# Altium PCB PCB1.PcbDoc
Units mil, origin at the board's own origin, x right, y up, seen from the top; angles counter-clockwise.
Board outline 3528 x 6485 mil, 2 copper layers (Top Layer, Bottom Layer); 79 components, 79 nets, 280 pads, 44 vias.
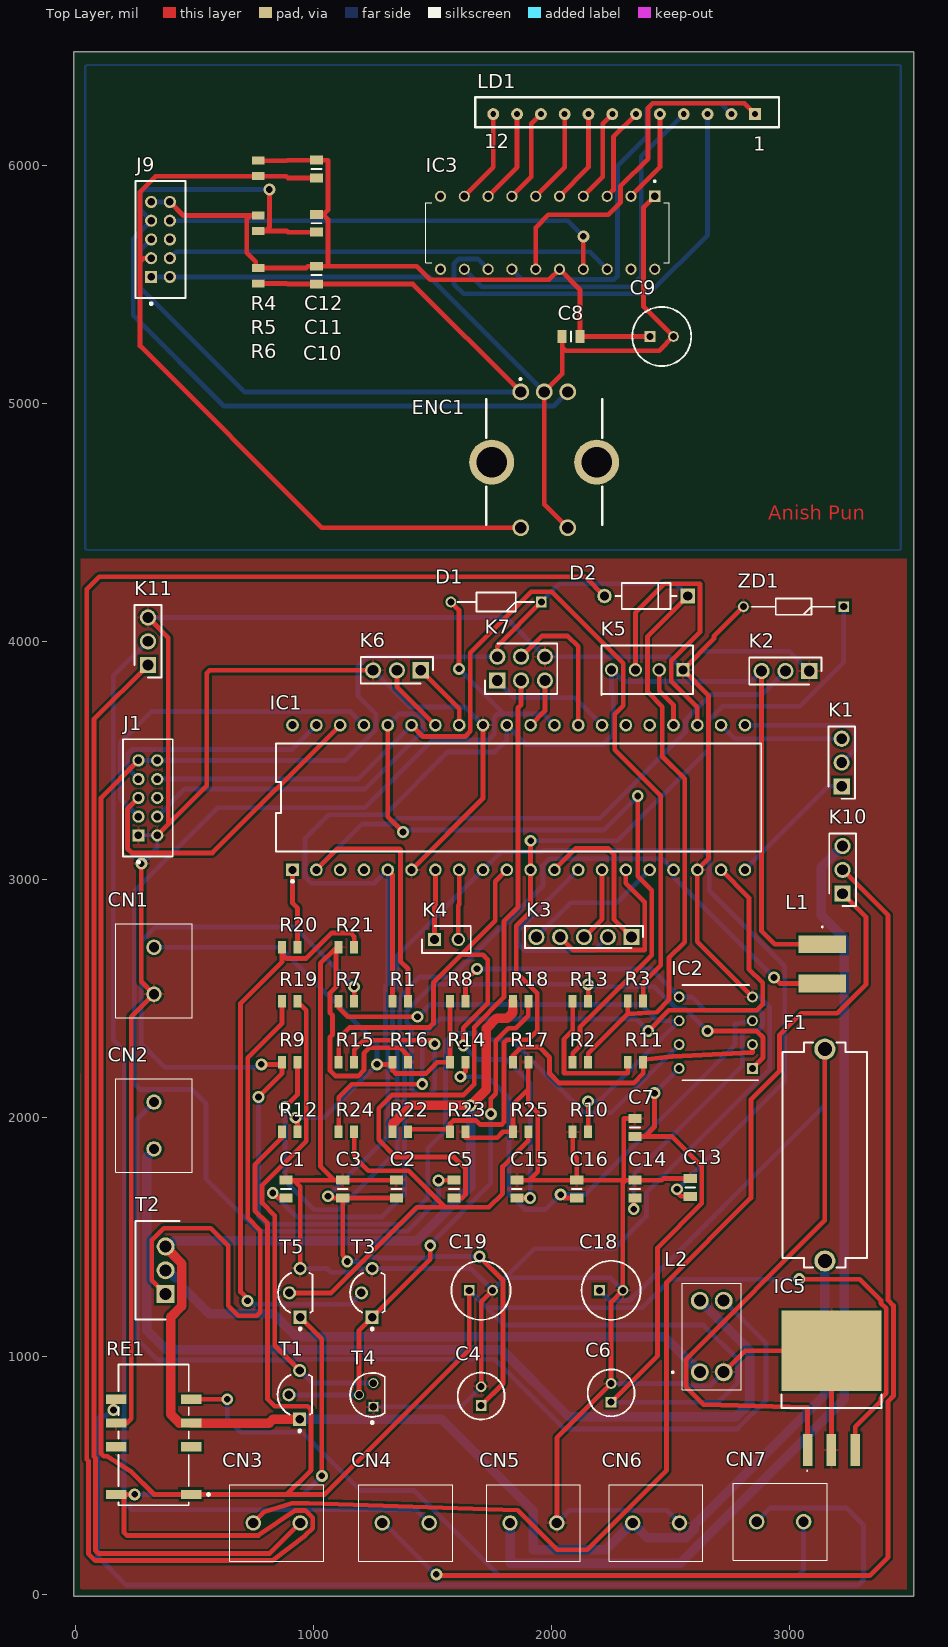
[diagram p0: Top Layer view]
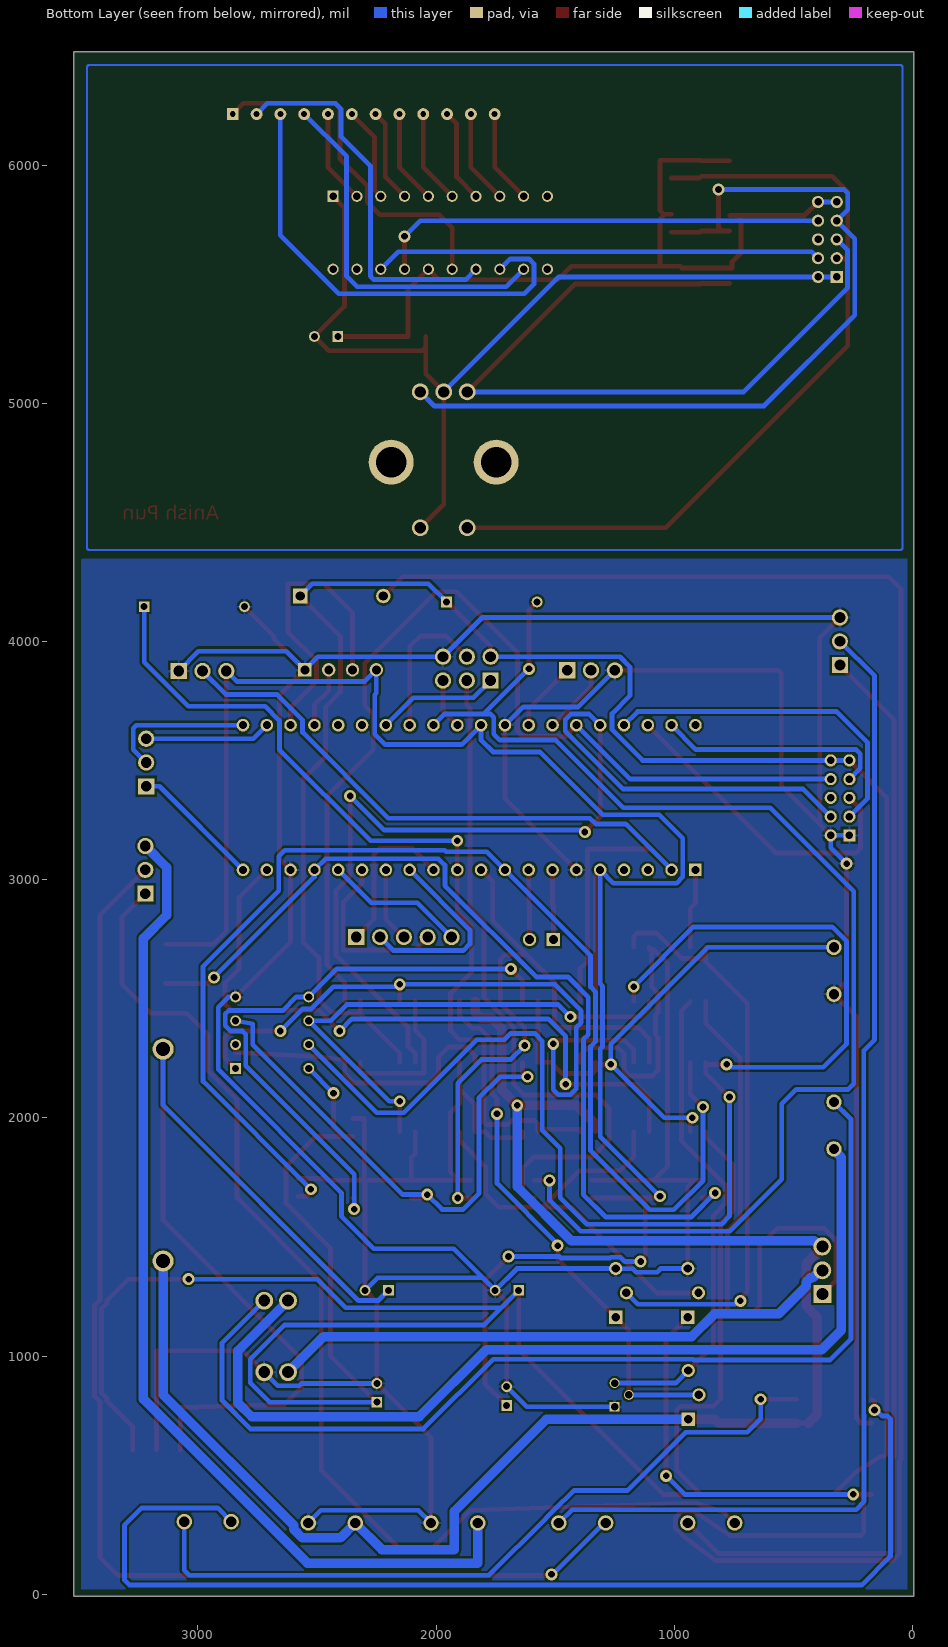
[diagram p1: Bottom Layer view, seen from below]
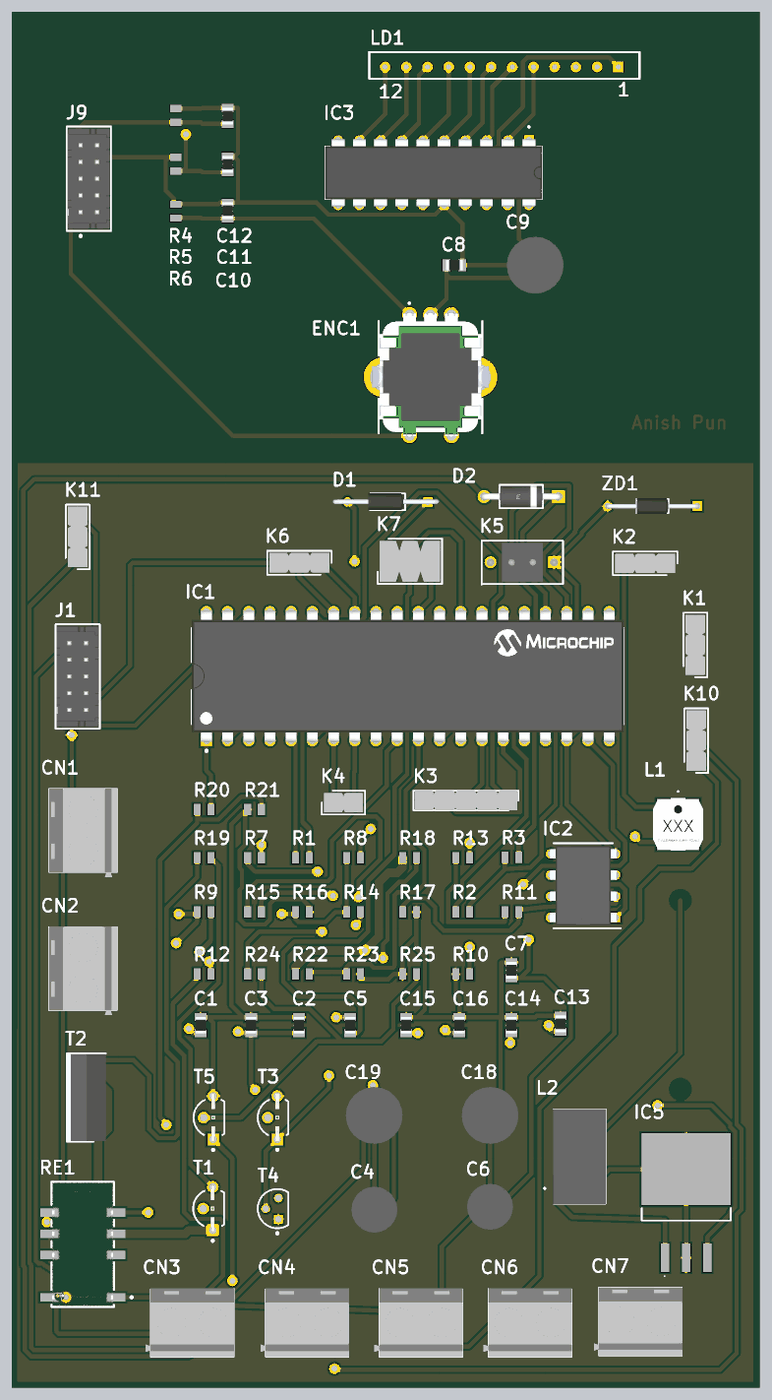
[diagram p2: 3D render of the assembled board from above, using the file's embedded part models]

## Layer stack, top to bottom
Top Solder: solder mask 0.4, Solder Resist, Dk 3.5
Top Layer: signal copper 1.4
Dielectric 1: dielectric 12.6, FR-4, Dk 4.8
Bottom Layer: signal copper 1.4
Bottom Solder: solder mask 0.4, Solder Resist, Dk 3.5

## Board outline
-7,-8 3521,-8 3521,6477 -7,6477

## Design rules (kind name [scope] priority, off if disabled: settings)
Clearance [All] p1: gap=10 ignorepadtopadclearanceinfootprint=FALSE
Height [All] p1: minheight=0 maxheight=50000 prefheight=500
PolygonConnect [All] p1: connectstyle=Relief reliefconductorwidth=10 reliefentries=4 polygonreliefangle="90 Angle" airgapwidth=10
RoutingVias [All] p1: holewidth=28 width=50 viastyle="Through Hole" minholewidth=28 minwidth=50 maxholewidth=28 maxwidth=50
SolderMaskExpansion [All] p1: expansion=4 istentingtop=FALSE
Width [All] p1: maxlimit=50 minlimit=15 preferedwidth=20 minimp=50.000000 maximp=50.000000 favimp=50.000000
29 further rules are at their usual default settings.

## Components (designator, comment, footprint, x,y, rotation, side; value= is the part's Value field where it differs from the comment)
C1 "100 nF" 0805 884.01,1701.34 r90 top
C2 "100 nF" 0805 1347.79,1701.35 r90 top
C3 "100 nF" 0805 1121.78,1701.34 r90 top
C4 "10μF 50V" "Elco 10uF 50V" 1703.41,792.74 r90 top
C5 "10 nF" 0805 1589.13,1701.34 r90 top
C6 "10μF 50V" "Elco 10uF 50V" 2248.99,806.21 r90 top
C7 "10 nF" 0805 2349.58,1959.9 r270 top
C8 "100 nF" 0805 2081,5282 r0 top
C9 "100 μF" "Elco 100uF 25V" 2412.57,5282 r0 top
C10 "10 nF" 0805 1011.53,5539.4 r90 top
C11 "10 nF" 0805 1011.53,5757.55 r90 top
C12 "10 nF" 0805 1011.53,5985.11 r90 top
C13 "10 nF" 0805 2581.47,1708.08 r270 top
C14 "10 nF" 0805 2349.58,1701.35 r270 top
C15 "10 nF" 0805 1853.27,1701.34 r270 top
C16 "10 nF" 0805 2104.59,1701.34 r270 top
C18 "100μF 25V" "Elco 100uF 25V" 2199.98,1276 r0 top
C19 "10μF 50V" "Elco 100uF 25V" 1653.26,1276 r0 top
CN1 "282836-2" "Schroefconnector 2 Pin" 329.17,2716.73 r90 top
CN2 "282836-2" "Schroefconnector 2 Pin" 329.17,2066.73 r90 top
CN3 "282836-2" "Schroefconnector 2 Pin" 943.07,299.13 r0 top
CN4 "282836-2" "Schroefconnector 2 Pin" 1484.76,299.13 r0 top
CN5 "282836-2" "Schroefconnector 2 Pin" 2021.31,299.13 r0 top
CN6 "282836-2" "Schroefconnector 2 Pin" 2536.27,299.13 r0 top
CN7 "282836-2" "Schroefconnector 2 Pin" 3057.38,304.79 r0 top
D1 "1N4148" 1N4148 2006,4167 r180 top
D2 "1N4007" 1N4007 2396,4192 r180 top
ENC1 "PEC11R-4225F-S0024" Encoder 1968,4754 r0 top
F1 "696101000002" FuseHolder -46853.32,51844.12 r90 top
IC1 "ATMEGA4809-PF" IC3 1861,3345.75 r90 top
IC2 "MCP6002-I/P" Opamp 2688.64,2358.28 r180 top
IC3 "TM1637" TM1637 1982.43,5717.51 r270 top
IC5 "TL780-05CKTTR" "DC-DC Convertor" 3174.27,870.47 r0 top
J1 "DF11-10DP-2DSA(24)" FP-DF11-10DP-2DSA_24-MFG 303.54,3344.25 r90 top
J9 "DF11-10DP-2DSA(24)" FP-DF11-10DP-2DSA_24-MFG 356.63,5689.48 r90 top
K1 "5-146280-3" "3 Pin Header" 3217.36,3392.6 r90 top
K2 "5-146280-3" "3 Pin Header" 3081,3877 r180 top
K3 "5-146280-5" "5 Pin Header" 2335.21,2759.56 r180 top
K4 "5-146280-2" "2 Pin Header" 1507.46,2749.52 r0 top
K5 "5-146280-4" "4 Pin Header" 2551,3882 r90 top
K6 "5-146280-3" "3 Pin Header" 1449.47,3880.02 r180 top
K7 "2x3 Pin Header" "2x3 Pin Header" 1771,3837 r0 top
K10 "5-146280-3" "3 Pin Header" 3221,2942 r90 top
K11 "5-146280-3" "3 Pin Header" 304.17,3901.73 r90 top
L1 "10uH" Smoorspoel 3136,2647 r270 top
L2 "Smoorspoel commom mode" "smoorspoel Common mode" 2621.84,932.5 r0 top
LD1 "7segment" 7segment 2444,6281 r180 top
R1 "4k7" Resistor 1363.54,2489.74 r180 top
R2 "4k7" Resistor 2120.33,2234.36 r0 top
R3 "4k7" Resistor 2351.42,2491.31 r180 top
R4 "10k" Resistor 766.53,5537 r90 top
R5 "10k" Resistor 766.53,5757.55 r90 top
R6 "10k" Resistor 766.53,5987.71 r90 top
R7 "18k" Resistor 1137.53,2489.74 r180 top
R8 "5k6" Resistor 1604.87,2489.74 r180 top
R9 "5k6" Resistor 899.76,2234.36 r180 top
R10 "100E" Resistor 2120.34,1942 r0 top
R11 "18k" Resistor 2351.42,2234.36 r0 top
R12 "1M" Resistor 899.76,1942 r180 top
R13 "18k" Resistor 2120.33,2489.74 r180 top
R14 "5k6" Resistor 1604.87,2234.36 r180 top
R15 "5k6" Resistor 1137.53,2234.36 r180 top
R16 "10M" Resistor 1363.54,2234.36 r180 top
R17 "100E" Resistor 1869.01,2234.36 r180 top
R18 "4k7" Resistor 1869.01,2489.74 r180 top
R19 "100E" Resistor 899.76,2489.74 r180 top
R20 "10k" Resistor 899.76,2717.04 r180 top
R21 "4k7" Resistor 1137.53,2717.04 r0 top
R22 "6k8" Resistor 1363.54,1942 r0 top
R23 "10k" Resistor 1604.87,1942 r0 top
R24 "10k" Resistor 1137.53,1942 r180 top
R25 "4k7" Resistor 1869.02,1942 r180 top
RE1 "G6S-2F-DC5" Relay 327.82,668.69 r90 top
T1 "BC547CZL1G" BC547C 941,837 r90 top
T2 "MOSFET" MOSFET 548.06,85.33 r90 top
T3 "BC547CZL1G" BC547C 1245.59,1265.35 r90 top
T4 "BC557C" BC557C 1245.59,836.79 r90 top
T5 "BC547CZL1G" BC547C 943.07,1265.35 r90 top
ZD1 "5V1" ZenerDiode 3226,4147 r180 top

## Footprints (in the part's own frame and the unit in brackets; to place one, negate y for a bottom-side part, rotate by r counter-clockwise, add the part's x,y. Pads: shape width x height; smd on the part's side, far side on the other; paste and mask are expansions set on the pad)
1N4007 [mm] "1N4007, 1000 V, 1 A"
  rect 1.55x1.55 hole 1 paste-2539.97 mask+0: 1(-4.44,0)
  round 1.55 hole 1 paste-2539.97 mask+0: 2(4.44,0)
  silkscreen extent -3.27,-1.4 3.27,1.4, body extent -5.32,-1.5 5.32,1.5, height 0.25
1N4148 [mm] "DIOAD1220W56L420D200"
  rect 1.15x1.15 hole 0.75: 1(1.27,0)
  round 1.15 hole 0.75: 2(10.922,0)
  silkscreen extent 2.03,-1 10.22,1, body extent -0.06,-1.02 12.7,0.98, height 1.99
"2 Pin Header" [mm]
  rect 1.425x1.425 hole 0.95: 1(0,0)
  round 1.425 hole 0.95: 2(2.54,0)
  silkscreen extent -1.32,-1.43 3.86,1.42, body extent -1.07,-1.17 3.61,1.17, height 8.12
"2x3 Pin Header" [mm] "HDRV6W67P254_2X3_721X488X872P"
  rect 1.725x1.725 hole 1.15: 1(0,0)
  round 1.725 hole 1.15: 2(0,2.54) 3(2.54,0) 4(2.54,2.54) 5(5.08,0) 6(5.08,2.54)
  silkscreen extent -1.32,-1.42 6.4,3.96, body extent -1.07,-1.17 6.15,3.71, height 8.12
"3 Pin Header" [mm]
  rect 1.725x1.725 hole 1.15: 1(0,0)
  round 1.725 hole 1.15: 2(2.54,0) 3(5.08,0)
  silkscreen extent -1.32,-1.42 6.4,1.42, body extent -1.07,-1.17 6.15,1.17, height 8.12
"4 Pin Header" [mm]
  rect 1.425x1.425 hole 0.95: 1(0,0)
  round 1.425 hole 0.95: 2(0,2.54) 3(0,5.08) 4(0,7.62)
  silkscreen extent -2.67,-1.06 2.59,8.68, body extent -2.33,-0.38 2.33,8, height 8.21
"5 Pin Header" [mm]
  rect 1.725x1.725 hole 1.15: 1(0,0)
  round 1.725 hole 1.15: 2(2.54,0) 3(5.08,0) 4(7.62,0) 5(10.16,0)
  silkscreen extent -1.21,-1.17 11.37,1.17, body extent -1.07,-1.17 11.23,1.17, height 8.12
7segment [mil]
  rect 50x50 hole 25: 1(-410,65)
  round 50 hole 25: 2(-310,65) 3(-210,65) 4(-110,65) 5(-10,65) 6(90,65) 7(190,65) 8(290,65) 9(390,65) 10(490,65) 11(590,65) 12(690,65)
  silkscreen extent -510,-5 765,120
0805 [mm]
  rect 0.95x1.4 smd: 1(-0.95,0) 2(0.95,0)
  silkscreen extent 0,-0.53 0,0.52, body extent -1,-0.63 1,0.63, height 0.6
BC547C [mm] "TO, 3-Leads, Body Dia 4.7mm, Pitch 2.6mm"
  rect 1.4x1.4 hole 0.9: 1(-2.6,0)
  round 1.4 hole 0.9: 2(0,1.143) 3(2.6,0)
  silkscreen extent -3.97,-1.34 2.13,2.35, body extent -2.84,-1.34 2.84,2.35, height 5.33
BC557C [mm] "TO, 3-Leads, Body Dia 4.7mm, Pitch 1.27mm"
  rect 1.05x1.05 hole 0.8: 1(-1.27,-0.127)
  round 1.05 hole 0.8: 2(0,1.397) 3(1.27,-0.127)
  silkscreen extent -3.07,-1.34 2.35,2.35, body extent -2.35,-1.33 2.36,2.36, height 7.87
"DC-DC Convertor" [mm]
  rect 1x3.4 smd: 1(-2.54,-6.745) 2(0,-6.745) 3(2.54,-6.745)
  rect 10.7x8.6 smd: 4(0,3.855)
  silkscreen extent -5.33,-9 5.33,-0.8
"Elco 10uF 50V" [mm] "CAPPRD200W55D500H1250"
  rect 1.15x1.15 hole 0.75: 1(0,0)
  round 1.15 hole 0.75: 2(2,0)
  silkscreen extent -1.5,-2.5 3.5,2.5, body extent -1.75,-2.75 3.75,2.75, height 12.5
"Elco 100uF 25V" [mm]
  rect 1.15x1.15 hole 0.75: 1(0,0)
  round 1.15 hole 0.75: 2(2.5,0)
  silkscreen extent -1.9,-3.15 4.4,3.15, body extent -2.15,-3.4 4.65,3.4, height 12.7
Encoder [mm]
  round 1.8 hole 1.2: 1(-2.5,7.5) 2(2.5,7.5) 3(0,7.5) 4(-2.5,-7) 5(2.5,-7)
  round 4.8 hole 3.28: 6(5.6,0) 7(-5.6,0)
  silkscreen extent -6.2,-6.7 6.2,8.95, body extent -7,-7.15 6.99,7.75, height 13.18
FP-DF11-10DP-2DSA_24-MFG [mm]
  rect 1.3x1.3 hole 0.8 paste-2539.97 mask+0: 1(-4,1)
  round 1.3 hole 0.8 paste-2539.97 mask+0: 2(-4,-1) 3(-2,1) 4(-2,-1) 5(0,1) 6(0,-1) 7(2,1) 8(2,-1) 9(4,1) 10(4,-1)
  silkscreen extent -6.97,-2.65 6.25,2.65, body extent -6.35,-2.75 6.35,2.75, height 0.25
FuseHolder [mm] "FUSEHOLDER BLOCKS - PCB - CLIP COVER - THT"
  round 2.25 hole 1.5: 1(-1281.3,-1270) 2(-1258.7,-1270)
  silkscreen extent -1282,-1274.5 -1258,-1265.5, body extent -1282,-1274.5 -1258,-1265.5, height 13.55
IC3 [mm] "ATmega4809-PF"
  rect 1.35x1.35 hole 0.85 paste-2539.97 mask+0: 1(-7.715,24.13)
  round 1.35 hole 0.85 paste-2539.97 mask+0: 2(-7.715,21.59) 3(-7.715,19.05) 4(-7.715,16.51) 5(-7.715,13.97) 6(-7.715,11.43) 7(-7.715,8.89) 8(-7.715,6.35) 9(-7.715,3.81) 10(-7.715,1.27) 11(-7.715,-1.27) 12(-7.715,-3.81) 13(-7.715,-6.35) 14(-7.715,-8.89) 15(-7.715,-11.43) 16(-7.715,-13.97) 17(-7.715,-16.51) 18(-7.715,-19.05) 19(-7.715,-21.59) 20(-7.715,-24.13) 21(7.715,-24.13) 22(7.715,-21.59) 23(7.715,-19.05) 24(7.715,-16.51) 25(7.715,-13.97) 26(7.715,-11.43) 27(7.715,-8.89) 28(7.715,-6.35) 29(7.715,-3.81) 30(7.715,-1.27) 31(7.715,1.27) 32(7.715,3.81) 33(7.715,6.35) 34(7.715,8.89) 35(7.715,11.43) 36(7.715,13.97) 37(7.715,16.51) 38(7.715,19.05) 39(7.715,21.59) 40(7.715,24.13)
  silkscreen extent -9.07,-25.88 5.76,25.88, body extent -8.49,-26.71 8.49,26.71, height 0.25
MOSFET [mm]
  rect 1.92x1.92 hole 1.28: 1(29.845,4.318)
  round 1.92 hole 1.28: 2(32.385,4.318) 3(34.925,4.318)
  silkscreen extent 27.12,2.82 37.66,7.51, body extent 27.18,2.82 37.59,7.51, height 18.84
Opamp [mil]
  rect 45.63x45.63 hole 29.88: 1(-153.74,150)
  round 45.63 hole 29.88: 2(-153.74,50) 3(-153.74,-50) 4(-153.74,-150) 5(153.74,-150) 6(153.74,-50) 7(153.74,50) 8(153.74,150)
  silkscreen extent -177,-200 140,200, body extent -159,-187 159,187, height 210
Relay [mm]
  rect 1x2.2 smd paste+0 mask+0: 1(-6.35,-4) 3(-1.27,-4) 4(1.27,-4) 5(3.81,-4) 8(3.81,4) 9(1.27,4) 10(-1.27,4) 12(-6.35,4)
  silkscreen extent -7.5,-5.98 7.5,3.75, body extent -7.6,-5.2 7.6,5.2, height 0.25
Resistor [mm] "Chip Resistor, 2-Leads, Body 2.00x1.25mm, IPC High Density"
  rect 0.85x1.35 smd: 1(-0.825,0) 2(0.825,0)
  body extent -1.1,-0.72 1.1,0.72, height 0.5
"Schroefconnector 2 Pin" [mm]
  round 1.65 hole 1.1: 1(0,0) 2(-5,0)
  silkscreen extent -7.5,-4.1 2.5,4.1, body extent -8.09,-4.1 2.51,4.1, height 10.02
Smoorspoel [mm] "10uH"
  rect 1.9x5.1 smd: 1(-2.1,0) 2(2.1,0)
  silkscreen extent -4,-0.05 -3.9,0.05, body extent -3.15,-3 3.15,3, height 4.5
"smoorspoel Common mode" [mil] "CM2545X171B10"
  round 75 hole 50: 1(0,0) 2(100,0) 3(100,300) 4(0,300)
  silkscreen extent -118,-74 174,374, body extent -74,-74 174,374, height 378
TM1637 [mm]
  rect 1.19x1.19 hole 0.79: 1(-3.89,11.43)
  round 1.19 hole 0.79: 2(-3.89,8.89) 3(-3.89,6.35) 4(-3.89,3.81) 5(-3.89,1.27) 6(-3.89,-1.27) 7(-3.89,-3.81) 8(-3.89,-6.35) 9(-3.89,-8.89) 10(-3.89,-11.43) 11(3.89,-11.43) 12(3.89,-8.89) 13(3.89,-6.35) 14(3.89,-3.81) 15(3.89,-1.27) 16(3.89,1.27) 17(3.89,3.81) 18(3.89,6.35) 19(3.89,8.89) 20(3.89,11.43)
  silkscreen extent -5.58,-13 3.2,13, body extent -4.03,-13 4.03,13, height 4.31
ZenerDiode [mm] "DIOAD1068W53L380D172"
  rect 1.15x1.15 hole 0.75: 1(0,0)
  round 1.15 hole 0.75: 2(10.7,0)
  silkscreen extent 0.93,-0.86 9.78,0.86, body extent -0.26,-0.95 10.95,0.95, height 1.9

## Part data
C1 C2 C3 C5 C7 C8 C10 C11 C12 C13 C14 C15 C16: library part "Condensator 0805", "Chip Multilayer Ceramic Capacitors for General Purpose, 0805, 10uF, X5R, 15%, 10%, 25V", Capacitance=10uF, Case Code (Imperial)=0805, Case Code (Metric)=2012, Dielectric=X5R, Max Operating Temperature=85°C, Min Operating Temperature=-55°C, Package Quantity=1, Tolerance=10%, Voltage=25V, Case/Package=0805, Depth=1.25mm, Height=1.25mm, Lead Free="Lead Free", Length=2mm, Material=Ceramic, Mount="Surface Mount", Packaging="Tape and Reel", Radiation Hardening=No, Termination=SMD/SMT, Thickness=0.053inch, Voltage Rating=25V, Voltage Rating (DC)=25V, Width=0.049inch
C4 C6 C9 C18 C19: library part "Condensator Elco", Manufacturer="AVX Interconnect / Elco", Part Number=02015A270JAT2A
CN1 CN2 CN3 CN4 CN5 CN6 CN7: library part "Schroefconnector 2 Pin L", "Connector", Manufacturer_Name="TE Connectivity", Datasheet Link=https://www.te.com/commerce/DocumentDelivery/DDEController?Action=showdoc&DocId=Customer+Drawing%7F282836%7FJ%7Fpdf%7FEnglish%7FENG_CD_282836_J.pdf%7F282836-2, Height=10mm, Manufacturer_Part_Number=282836-2
D1: "1N4148, 100 V, 200 mA, 4 ns", Average Rectified Current=200mA, Capacitance=4pF, Case/Package=DO-35, Current=4A, Forward Current=300mA, Forward Voltage=1V, Max Forward Surge Current (Ifsm)=1A, Max Operating Temperature=175°C, Max Power Dissipation=500mW, Max Repetitive Reverse Voltage (Vrrm)=100V, Max Reverse Current=5uA, Min Operating Temperature=-65°C, Package Quantity=2000, Contact Plating=Tin, Current Rating=200mA, Diameter=1.91mm, Element Configuration=Single, Height=4.56mm, Lead Free="Lead Free", Length=4.56mm, Max Reverse Voltage (DC)=100V, Max Surge Current=4A, Mount="Through Hole", Number of Pins=2, Output Current=200mA, Outside Diameter=1.85mm, Packaging=Bulk, Peak Non-Repetitive Surge Current=4A, Polarity=Standard, Power Dissipation=500mW, Radiation Hardening=No, REACH SVHC="No SVHC", Recovery Time=4ns, Reverse Recovery Time=4ns, Reverse Voltage=100V, Series=-, Voltage=100V, Voltage Rating (DC)=100V, Weight=0.01lb, Width=1.91mm
D2: "1000 V, 1 A", Average Rectified Current=200mA, Capacitance=4pF, Case/Package=DO-35, Current=4A, Forward Current=300mA, Forward Voltage=1V, Max Forward Surge Current (Ifsm)=1A, Max Operating Temperature=175°C, Max Power Dissipation=500mW, Max Repetitive Reverse Voltage (Vrrm)=100V, Max Reverse Current=5uA, Min Operating Temperature=-65°C, Package Quantity=2000, Contact Plating=Tin, Current Rating=200mA, Diameter=1.91mm, Element Configuration=Single, Height=4.56mm, Lead Free="Lead Free", Length=4.56mm, Max Reverse Voltage (DC)=100V, Max Surge Current=4A, Mount="Through Hole", Number of Pins=2, Output Current=200mA, Outside Diameter=1.85mm, Packaging=Bulk, Peak Non-Repetitive Surge Current=4A, Polarity=Standard, Power Dissipation=500mW, Radiation Hardening=No, REACH SVHC="No SVHC", Recovery Time=4ns, Reverse Recovery Time=4ns, Reverse Voltage=100V, Series=-, Voltage=100V, Voltage Rating (DC)=100V, Weight=0.01lb, Width=1.91mm
ENC1: library part Encoder, "Undefined or Miscellaneous", Manufacturer_Name=Bourns, Mouser2 Part Number=652-PEC11R-4225F-S24, Datasheet Link=https://componentsearchengine.com//PEC11R-4225F-S0024.pdf, Manufacturer_Part_Number=PEC11R-4225F-S0024, Mouser2 Price/Stock=https://www.mouser.com/Search/Refine.aspx?Keyword=652-PEC11R-4225F-S24
F1: library part FuseHolder, Fuse Current=10A, Max Operating Temperature=120°C, Min Operating Temperature=-30°C, Voltage Rating (AC)=250V, Height=13.6mm, Mount="Through Hole", NexarPartId=56808803, Packaging=Box, REACH SVHC=Unknown, RoHS=Non-Compliant
IC1: library part IC3, "ATmega4809-PF", RoHS Compliant=Yes
IC2: library part Opamp, "AMP-OPA-MCP6002-IL8", Case/Package=PDIP, Input Bias Current=1pA, Input Offset Voltage (Vos)=4.5mV, Max Frequency=1kHz, Max Input Voltage=6V, Max Operating Temperature=85°C, Min Input Voltage=1.8V, Min Operating Temperature=-40°C, Nominal Supply Current=100uA, Operating Supply Voltage=5.5V, Output Current=23mA, Package Quantity=60, Power Supply Rejection Ratio (PSRR)=86dB, Voltage Gain=112dB, Amplifier Type="GENERAL PURPOSE", Bandwidth=1MHz, Common Mode Rejection Ratio=60dB, Gain Bandwidth Product=1MHz, Height=0.195inch, Input Offset Voltage-Max=4.5mV, Lead Free="Lead Free", Length=0.4inch, Max Supply Voltage=6V, Min Supply Voltage=1.8V, Mount="Through Hole", Number of Amplifiers=2, Number of Channels=2, Number of Circuits=2, Number of Elements=2, Number of Pins=8, Operating Supply Current=100uA, Output Current per Channel=23mA, Packaging=Rail/Tube, Radiation Hardening=No, REACH SVHC="No SVHC", RoHS Compliant=Yes, Slew Rate=0.6V/µs, Slew Rate-Nom=0.6V/µs, Supply Current=100uA, Technology=CMOS, Unity Gain Bandwidth Product=1MHz, Width=0.28inch
IC3: "LED Drive Control Special Circuit", Package=Package, Availability="Not in stock", Check_prices=https://www.snapeda.com/parts/TM1637/Titan+Micro+Electronics/view-part/?ref=eda, MF="Titan Micro Electronics", MP=TM1637, Price=None, SnapEDA_Link=https://www.snapeda.com/parts/TM1637/Titan+Micro+Electronics/view-part/?ref=snap
IC5: library part "DC/DC Convertor", "IC REG LIN 5V 1.5A DDPAK/TO263-3", Case/Package=TO-263, Dropout Voltage=2V, Max Input Voltage=25V, Max Operating Temperature=125°C, Max Output Current=1.5A, Max Output Voltage=5V, Min Input Voltage=7V, Min Operating Temperature=0°C, Output Voltage Accuracy=1%, Package Quantity=1, Power Supply Rejection Ratio (PSRR)=85dB, Quiescent Current=8mA, Accuracy=1%, Height=4.83mm, Lead Free="Lead Free", Length=10.67mm, Mount="Surface Mount", Nominal Output Voltage=5V, Number of Outputs=1, Number of Pins=3, Number of Regulators=1, Output Current=1.5A, Output Type=Fixed, Output Voltage=5V, Packaging="Tape and Reel", Polarity=Positive, REACH SVHC="No SVHC", Weight=0.050897oz, Width=9.65mm
J1 J9: library part CMP-11610-000008-1, "CONN HEADER VERT 10POS 2MM", Current Rating=2A, Manufacturer=Hirose, Temperature="-40°C to +85°C", Temperature Range High=+85°C, Temperature Range Low=-40°C, Voltage Rating=250V, Automotive=No, Category=Conn, ComponentLink2Description=Datasheet, ComponentLink2URL=https://www.hirose.com/product/document?clcode=CL0543-0520-0-24&productname=DF11-10DP-2DSA(24)&series=DF11&documenttype=Catalog&lang=en&documentid=D31688_en, Conn Gender=Male, Conn Orientation=Straight, Contact Material=Tin,Nickel, Device Class L1=Connectors, Device Class L2="Headers and Wire Housings", Device Class L3=unset, Digikey Description="CONN HEADER VERT 10POS 2MM", Footprint Url=https://www.hirose.com/product/document?clcode=CL0543-0520-0-24&productname=DF11-10DP-2DSA(24)&series=DF11&documenttype=2DDrawing&lang=en&documentid=0000995333, Height=6.9mm, Lead Free=Yes, Manufacturer Part Number=DF11-10DP-2DSA(24), Mouser Description="Headers & Wire Housings 10P STRT HEADER THRU HL,BD MNT,SN", Number Of Contacts=10, Number Of Rows=2, Octopart=https://octopart.com/df11-10dp-2dsa%2824%29-hirose-39521433, Package=DF11-10DP-2DSA(24), Pitch=2mm, RoHS=TRUE
K1 K2 K6 K10 K11: library part "3 Pin Header", "Connector 5-146280-3", Manufacturer_Name="TE Connectivity", Mouser2 Part Number=571-5-146280-3, Datasheet Link=https://componentsearchengine.com//5-146280-3.pdf, Height=8.21mm, Manufacturer_Part_Number=5-146280-3, Mouser2 Price/Stock=https://www.mouser.com/Search/Refine.aspx?Keyword=571-5-146280-3
K3: library part "5 Pin Header", "Connector 5-146280-5", Manufacturer_Name="TE Connectivity", Mouser2 Part Number=571-5-146280-5, Datasheet Link=https://componentsearchengine.com//5-146280-5.pdf, Height=8.21mm, Manufacturer_Part_Number=5-146280-5, Mouser2 Price/Stock=https://www.mouser.com/Search/Refine.aspx?Keyword=571-5-146280-5
K4: library part "2 Pin Header", "Connector", Manufacturer_Name="TE Connectivity", Datasheet Link=http://www.te.com/commerce/DocumentDelivery/DDEController?Action=showdoc&DocId=Customer+Drawing%7F146280%7FH2%7Fpdf%7FEnglish%7FENG_CD_146280_H2.pdf%7F5-146280-2, Height=8.72mm, Manufacturer_Part_Number=5-146280-2
K5: library part "4 Pin Header", "Connector 5-146280-4", Manufacturer_Name="TE Connectivity", Datasheet Link=https://datasheet.datasheetarchive.com/originals/distributors/DKDS-20/396066.pdf, Height=8.21mm, Manufacturer_Part_Number=5-146280-4
K7: "Connector", Manufacturer_Name="TE Connectivity", Manufacturer_Part_Number=5-146256-3, Datasheet Link=https://www.te.com/commerce/DocumentDelivery/DDEController?Action=srchrtrv&DocNm=146256&DocType=Customer+Drawing&DocLang=English, Height=8.72mm
L1: library part Smoorspoel, "Inductor VLS6045EX-100M-H", Manufacturer_Name=TDK, Manufacturer_Part_Number=VLS6045EX-100M-H, Mouser2 Part Number=810-VLS6045EX-100M-H, Datasheet Link=https://componentsearchengine.com//VLS6045EX-100M-H.pdf, Mouser2 Price/Stock=https://www.mouser.com/Search/Refine.aspx?Keyword=810-VLS6045EX-100M-H
L2: "Transformer CM2545X171B-10", Manufacturer_Name="Laird Technologies", Manufacturer_Part_Number=CM2545X171B-10, Datasheet Link=https://datasheet.datasheetarchive.com/originals/dk/DKDS-7/122753.pdf, Height=9.5mm
R1 R2 R3 R4 R5 R6 R7 R8 R9 R10 R11 R12 R13 R14 R15 R16 R17 R18 R19 R20 R21 R22 R23 R24 R25: library part Resistor, "Resistor", Manufacturer="Vishay Dale", Part Number=CRCW08050000Z0EA
RE1: library part Relay, "RELAY TELECOM DPDT 2A 5VDC", Ambient Temperature Range High=+85°C, Ambient Temperature Range Low=-40°C, Coil Current=28.1mA, Coil Power=140mW, Coil Resistance=178Ω, Coil Voltage=5V, Current Rating=2A, Manufacturer=Omron, Temperature="-40°C to +85°C", Automotive=No, Category=Relay, Coil Type=Non-Latching, ComponentLink2Description=Datasheet, ComponentLink2URL=https://omronfs.omron.com/en_US/ecb/products/pdf/en-g6s.pdf, Device Class L1=Electromechanical, Device Class L2=Relays, Device Class L3="Signal Relays", Digikey Description="RELAY TELECOM DPDT 2A 5VDC", Height=9.4mm, Lead Free=Yes, Manufacturer Part Number=G6S-2F-DC5, Mouser Description="Electromechanical Relay 5VDC 178Ohm 2A DPDT (14.8x9.2x9.2)mm SMD Signal Relay", Number Of Contacts=2, Octopart=https://octopart.com/g6s-2f-dc5-omron-85236, Package=G6S-2F-DC5, RoHS=TRUE, Standoff Height=0.35mm, Switching Current=2A, Temperature Range High=+85°C, Temperature Range Low=-40°C, Throw Configuration=DPDT
T1 T3 T5: library part BC547C, "BC547C, 45 V, 100 mA, 500 mW, / hfe = 400", Manufacturer="On Semiconductor", ComponentLink1Description="Manufacturer URL", ComponentLink1URL=http://www.onsemi.com/, ComponentLink2Description=Datasheet, ComponentLink2URL=http://www.onsemi.com/pub_link/Collateral/BC546-D.PDF, ComponentLink3Description="Package Specification", ComponentLink3URL=http://www.onsemi.com/pub_link/Collateral/MAC97-D.PDF, DatasheetVersion="Rev. 7", fT Min (MHz)=150, IC Continuous (A)=0.1, Mounting Technology="Through Hole", PackageDescription="3-Pin Transistor Outline, Body 4.825 x 3.685 mm, Pitch 1.27 mm", PackageReference=TO-92-3-29-11_AM_BL, PackageVersion="Rev. AM", Packing="Ammo Box", PartNumber=BC547CZL1G, Polarity=NPN, RoHS=TRUE
T2: "P-MOSFET, 55 V, 17 A, / 100 mΩ"
T4: "45 V, –100 mA, 500 mW, / hfe = 400", Manufacturer="On Semiconductor", ComponentLink1Description="Manufacturer URL", ComponentLink1URL=http://www.onsemi.com/, ComponentLink2Description=Datasheet, ComponentLink2URL=http://www.onsemi.com/pub_link/Collateral/BC556B-D.PDF, ComponentLink3Description="Package Specification", ComponentLink3URL=http://www.onsemi.cn/pub_link/Collateral/2N6426-D.PDF, DatasheetVersion="Rev. 3", IC Continuous (A)=-0.1, Mounting Technology="Through Hole", PackageDescription="3-Pin Transistor Outline, Body 4.825 x 3.685 mm, Pitch 1.27 mm", PackageReference=TO-92-3-29-11_AM_SL, PackageVersion="Rev. AM", Packing="Bulk Box", PartNumber=BC557C, Polarity=PNP, RoHS=FALSE
ZD1: library part ZenerDiode, "zenerdiode 5,1 V, 500 mW"

## Via types
v1: diameter 50, hole 28, Top Layer to Bottom Layer, 44 vias

## Nets (pads, with @x,y where several pads share a name; then routed paths per layer and width w, separated by ;. In a path a pad name is that pad's centre, name@x,y a point inside that pad or via, vN(x,y) a via of type N, cw(c..) or ccw(c..) an arc to the next point about the centre after c; other vN are vias at no path point)
+5: C6.1 C7.2 C19.1 D1.1 D2.1 IC2.8 IC5.3 J1.9 J1.10 K7.2 R2.2 R3.2 R12.2 RE1.1 | length 18352.5
  Top Layer w20: J1.9 107.03,3344.59 107.03,590.72 118.74,579.01 134.03,579.01 233.01,514.99 234.51,513.49 329.31,418.69 RE1.1 887.69,418.69 ; R12.2 867.28,1918 753,1803.72 753,1610 806,1557 806,819 836,789 974.5,789 989,774.5 989,520 887.69,418.69 ; C19.1 1653.26,1026.26 1045.69,418.69 887.69,418.69 ; K7.2 1771,3982 D1.1 ; R2.2 2152.82,2270.87 2318.94,2437 ; C6.1 2444,1001.22 2444,1455 2630,1641 2630,1797 2504.5,1922.5 2391.5,1922.5 ; R3.2 2318.94,2437 ; C7.2 2391.5,1922.5 ; v1(2431,2104.38) 2431,1962 2391.5,1922.5 ; D2.1 2402,4023.2 2402,3789 2464,3727 2464,3518 2558,3424 2558,2738 2492,2672 2492,2496 2440,2444 2318.94,2437 ; v1(3039,1323) 3293.43,1323 3382,1234.43 3382,1222.71 3404.9,1199.82 3404.9,844.66 3382,821.77 3382,810.05 3274.27,702.32 IC5.3
  Bottom Layer w20: J1.9 J1.10 1132.73,3501.73 1261,3630 1261,3698.39 1186,3773.39 1186,3895.39 1227.61,3937 K7.2 ; C19.1 1725.9,1203.36 ; D1.1 2032,4243 2519.8,4243 D2.1 ; C6.1 2699.21,806.21 2780,887 2780,987 2637,1130 1799.26,1130 1725.9,1203.36 ; v1(2431,2104.38) IC2.8 ; v1(3039,1323) 2499,1323 2379.36,1203.36 1725.9,1203.36
+5V: C2.1 C3.1 C4.1 IC1.5 IC1.31 K2.3 K5.4 L1.1 R1.2 | length 8314.2
  Top Layer w20: v1(1059.94,1671) 1067,1663.94 C3.1 ; v1(1141,1397) 1141,1405.12 1121.78,1424.34 C3.1 ; IC1.5 1331.06,3021.94 R1.2 ; C2.1 1234,1663.95 C3.1 ; v1(1696,1418) 1795,1319 1795,884.33 C4.1 ; K2.3 2881,2784.68 2936,2729.68 L1.1
  Bottom Layer w20: v1(1059.94,1671) 1311,1922.06 1311,2290 1301,2300 1301,2553 1311,2563 IC1.5 1255,2986 990,2986 964,3012 964,3174 1063,3273 1299.84,3273 1563.84,3537 1761,3537 1811,3587 IC1.31 1892.5,3568 2214,3568 2258,3612 2258,3777 2251,3784 K5.4 2300,3833 2837,3833 K2.3 ; v1(1141,1397) 1207.62,1397 1225.89,1415.27 1265.29,1415.27 1268.55,1412 1475.22,1412 1481.22,1418 v1(1696,1418)
GND: C1.2 C2.2 C3.2 C4.2 C6.2 C7.1 C13.1 C14.1 C15.1 C16.1 C18.2 C19.2 CN1.2 CN5.1 CN6.1 IC1.6 IC1.18 IC1.32 IC2.4 IC5.2 IC5.4 J1.1 J1.2 K2.1 K5.1 K6.3 K7.6 K11.3 L2.2 R10.1 R16.1 R17.1 R21.1 R23.2 R25.2 RE1.9 T3.3 T4.1 T5.3 ZD1.2 | length 24078.8
  Top Layer w20: RE1.9 215.69,718.69 234,737 234,2424.71 CN1.2 276,2573.05 v1(276,3068) ; K11.3 389,4016.9 389,3232.86 ; J1.2 389,3232.86 ; C1.2 916.32,1738.75 ; T5.3 943.07,1712 916.32,1738.75 ; K6.3 562.51,3880.02 550.79,3868.3 550.79,3394.65 389,3232.86 ; C2.2 1270.24,1738.75 C3.2 1086,1738.75 ; R16.1 1396.02,2262 1363.02,2295 1234.07,2295 1210.91,2271.84 1210.91,2199.91 1187,2176 1091.82,2176 1068.32,2199.5 1068.32,2338.74 1079,2349.43 1079,2431.67 1068.32,2442.35 1068.32,2524.6 1094,2550.28 1094,2705.99 1100.03,2712.02 R21.1 1105.05,2707 1086,2707 1028,2649 1028,1796.75 1086,1738.75 ; IC1.6 1711,3342 IC1.32 ; R23.2 1637.35,1917 1770,1917 1795,1942 R25.2 1836.54,2055 1901.5,2119.96 ; C4.2 1703.41,1227.72 C19.2 ; C15.1 1905.63,1738.75 ; R17.1 1901.5,2119.96 ; CN5.1 2021.31,657.27 C6.2 2248.99,1226.58 C18.2 2298.4,1726.15 2311,1738.75 ; R10.1 2087.86,1848.73 2104.59,1832 C16.1 ; C7.1 2302,1997.3 2302,1738.75 ; C13.1 2468.74,1745.48 2462,1738.75 C14.1 2311,1738.75 ; L2.2 2811.57,1022.24 IC5.4 IC5.2 ; ZD1.2 2681,4023.26 2681,4012 K5.1 2658,3775 2658,3089 IC1.18 2611,2739.66 IC2.4 ; 916.32,1738.75 1002,1738.75 1086,1738.75 ; 1901.5,2119.96 1901.5,2062 1941,2022.5 1941,1774.12 1905.63,1738.75 ; 1905.63,1738.75 C16.1 ; C16.1 2302,1738.75 ; 2302,1738.75 2311,1738.75
  Bottom Layer w20: J1.1 J1.2 342.91,3134.91 v1(276,3068) ; K11.3 1806.27,4101.73 K7.6 2496,3937 K5.1 2629,3960 2998,3960 K2.1 ; T5.3 1055.78,1367.71 1071.49,1352 1159.64,1352 1174.64,1367 1235.38,1367 1236.09,1367.71 1659.98,1367.71 C19.2 1804.09,1328.4 ; K6.3 1403.42,3726.08 1634.42,3726.08 IC1.32 ; T4.1 1618.73,786.79 C4.2 ; CN5.1 2074.18,352 2483.4,352 CN6.1 ; C6.2 2564.05,884.95 2574,875 2664.33,875 L2.2 ; C18.2 2246,1328.4 1804.09,1328.4 ; IC2.4 2871.32,2508.28 2915.19,2464.4 2915.19,2203.55 2397.42,1685.78 2397.42,1587 2261.42,1451 1926.69,1451 1804.09,1328.4
NetC1_1: C1.1 IC1.17 L1.2 | length 3837
  Top Layer w20: v1(828,1685) 849.06,1663.94 C1.1 ; v1(2933,2590) 2958.68,2564.32 L1.2
  Bottom Layer w20: v1(828,1685) 929,1584 1286.79,1584 1381,1678.21 1381,2330 1361,2350 1361,2507 1446,2592 1579,2592 1963,2976 1963,3062 1990,3089 2464,3089 IC1.17 2511,3012 v1(2933,2590)
NetC5_1: C5.1 K7.3 | length 2930.8
  Top Layer w20: C5.1 1623.5,1663.94 1637,1677.44 1637,1788 1589,1836 1345,1836 1273,1908 1273,2041 1328,2096 1629.07,2096 1674,2140.93 1674,2141.02 ; 1674.09,2141.02 1674.09,2381.67 1799.17,2506.75 1799.17,2826.14 1858,2884.97 1858,3722 1871,3735 K7.3
NetC5_2: C5.2 D1.2 IC1.29 | length 5427.3
  Top Layer w20: v1(1524,1738) 1524.75,1738.75 C5.2 ; D1.2 1610,4133 v1(1610,3886)
  Bottom Layer w20: v1(1524,1738) 1524,1656 1392,1524 767,1524 548,1743 548,2059 487,2120 270,2120 246,2144 246,2952 597,3303 1214,3303 1498,3587 1733,3587 1758,3612 1758,3683 1772,3697 1799,3697 ; v1(1610,3886) 1799,3697 ; IC1.29 1963.5,3697 1799,3697
NetC8_1: C8.1 C9.2 ENC1.3 ENC1.5 IC3.1 J9.1 J9.2 | length 3885.3
  Top Layer w20: C8.1 2043.6,5237 ; ENC1.5 1968,4576.84 ENC1.3 2043.6,5124.87 2043.6,5237 ; IC3.1 2385,5823.23 2385,5408 C9.2 2451,5222 2058.6,5222 2043.6,5237
  Bottom Layer w20: J9.1 J9.2 1485.28,5532 ENC1.3
NetC8_2: C8.2 C9.1 C10.2 C11.2 C12.2 IC3.16 J9.9 J9.10 R4.2 R5.2 R6.2 | length 3435.2
  Top Layer w20: J9.10 452.93,5790.03 734.53,5790.03 ; R5.2 734.53,5790.03 ; R6.2 887,6020.19 889.32,6022.52 C12.2 1060,6022.52 1060,5812 1042.95,5794.95 1039.55,5794.95 ; C11.2 1039.55,5794.95 ; C9.1 C8.2 2118.4,5478.39 IC3.16 1988.07,5520 1489,5520 1432.2,5576.8 1060,5576.8 ; 734.53,5790.03 719,5774.5 719,5634 757,5596 757,5569.48 R4.2 967.68,5569.48 975,5576.8 C10.2 1060,5576.8 ; 1039.55,5794.95 1060,5774.5 1060,5576.8
  Bottom Layer w20: J9.9 J9.10
NetC10_1: C10.1 ENC1.1 J9.5 R4.1 | length 3292.5
  Top Layer w20: R4.1 887,5504.52 889.52,5502 C10.1 1416.85,5502 ENC1.1
  Bottom Layer w20: J9.5 271.67,5643.89 271.67,5486.41 708.8,5049.28 ENC1.1
NetC11_1: C11.1 ENC1.2 J9.7 R5.1 | length 3547
  Top Layer w20: R5.1 798.5,5725.07 ; v1(814,5899) 814,5740.57 798.5,5725.07 ; C11.1 890.92,5720.15 886,5725.07 798.5,5725.07
  Bottom Layer w20: v1(814,5899) 286,5899 271,5884 271,5814.48 J9.7 241.67,5692.63 241.67,5371.33 623,4990 2007.15,4990 ENC1.2
NetC12_1: C12.1 ENC1.4 J9.3 R6.1 | length 3386.1
  Top Layer w20: J9.3 286,5610.74 271,5595.74 ; C12.1 892.52,5947.71 885,5955.23 R6.1 336,5955.23 271,5890.23 271,5595.74 ; ENC1.4 1034.59,4478.41 271,5242 271,5595.74
NetC13_2: C13.2 IC1.9 R9.1 | length 5277.9
  Top Layer w20: v1(879,2045.78) 932.24,2099.02 R9.1 ; v1(2526,1700.48) 2531.74,1694.74 2531.74,1681.26 2542.32,1670.68 C13.2
  Bottom Layer w20: v1(879,2045.78) 879,1737 1002,1614 1102.5,1614 1351,1862.5 1351,2300 1331,2320 1331,2530 1351,2550 1351,2682 IC1.9 1787.21,3118.21 1958,3118.21 1963.79,3124 2636,3124 2661,3099 2661,2954.85 2978.38,2637.46 2978.38,2153.38 2526,1701 v1(2526,1700.48)
NetC14_2: C14.2 IC2.5 R8.1 | length 2559.7
  Top Layer w20: R8.1 1637.35,2577.35 v1(1686,2626) ; v1(2344,1617) 2344,1663.94 C14.2
  Bottom Layer w20: v1(1686,2626) 2417.18,2626 IC2.5 2587.71,2508.28 2644.9,2451.09 2871.1,2451.09 2885.19,2437 2885.19,2387 2863.19,2365 2813.56,2365 2799.56,2351 2799.56,2219.01 2344,1763.45 v1(2344,1617)
NetC15_2: C15.2 IC1.10 R15.2 | length 2703.9
  Top Layer w20: R15.2 1105.05,2287 1105.05,2333.05 1152,2380 1198.05,2380 1486,2380 1503,2397 1503,2569 1506,2572 1619,2685 ; v1(1628,2304) 1628,2378.01 1731,2481.01 1731,2665 1711,2685 1619,2685 ; IC1.10 1762,2993 1762,2828 1619,2685 ; C15.2 v1(1909,1663.94)
  Bottom Layer w20: v1(1628,2304) 1686,2246 1809,2246 1909,2146 v1(1909,1663.94)
NetC16_2: C16.2 IC2.3 R14.1 | length 2210.8
  Top Layer w20: v1(1616,2173) 1637.35,2194.35 R14.1 ; v1(2037,1678) 2051.06,1663.94 C16.2
  Bottom Layer w20: v1(1616,2173) 1731,2173 1820,2084 1820,1682 1886,1616 1975,1616 v1(2037,1678) 2139.14,1678 2769.56,2308.43 2769.56,2395.02 IC2.3
NetC18_1: C18.1 F1.2 IC5.1 | length 3920.2
  Top Layer w20: IC5.1 3074.27,784 2636,797 2564,869 2564,987 3146.68,1569.68 F1.2
  Bottom Layer w20: C18.1 2242.62,1233.36 2326.36,1233.36 3146.68,2053.68 F1.2
NetCN1_1: CN1.1 R8.2 R12.1 R14.2 R16.2 | length 2308.6
  Top Layer w20: v1(924,2001) 932.24,1992.76 R12.1 ; v1(1266,2225) R16.2@1331.06,2225 ; R16.2 R16.2@1331.06,2225 ; R8.2 R14.2 1572.39,2234 1519,2234 1472,2187 1343.56,2187 1331.06,2199.5 R16.2@1331.06,2225
  Bottom Layer w20: CN1.1 858.27,2716.73 1266,2309 v1(1266,2225) 1042,2001 v1(924,2001)
NetCN2_1: CN2.1 L2.3 | length 4367.6
  Bottom Layer w20: CN2.1 258,1995.56 258,1071 346,983 917.38,983 921.3,986.92 1760.08,986.92 2053,694 2779.64,694 2899,813.36 2899,1055.34 L2.3
NetCN2_2: CN2.2 L2.4 | length 3999.2
  Bottom Layer w40: CN2.2 329.17,1865.14 298,1833.97 298,1109 380.08,1026.92 1789.08,1026.92 2071,745 2774.07,745 2832,802.93 2832,1022.34 L2.4
NetCN3_1: CN3.1 K11.1 | length 4733
  Top Layer w20: K11.1 77.03,3674.59 77.03,578.3 84,571.33 84,182.72 89.86,176.86 95.72,171 814.94,171 CN3.1
NetCN3_2: CN3.2 K10.1 | length 4864.5
  Top Layer w20: CN3.2 793.23,346.14 908.9,381.61 977.23,381.61 1857,352 2022,187 2148,187 2482,521 2482,1310 2836,1664 2836,2077 2956.75,2197.75 2956.75,2348.75 3047.25,2439.25 3198.25,2439.25 3319,2560 3319,2844 K10.1
NetCN4_1: CN4.1 K11.2 | length 5011.8
  Bottom Layer w20: K11.2 158.58,3856.14 158.58,2328.15 204,2282.73 204,754.74 203,753.74 203,388 236,355 1428.89,355 CN4.1
NetCN4_2: CN4.2 K10.2 | length 5232.7
  Top Layer w20: v1(1515,83) 1520,78 3335,78 3412,155 3412,809.34 3434.9,832.24 3434.9,1212.24 3412,1235.14 3412,2851 K10.2
  Bottom Layer w20: CN4.2 1293.39,299.13 1509.52,83 v1(1515,83)
NetCN5_2: CN5.2 K10.3 | length 4275.5
  Bottom Layer w20: 1824.46,130.72 1836.18,119
  Bottom Layer w40: CN5.2 1824.46,130.72 2540.72,130.72 3229,819 3229,2754 3131,2852 3131,3052 K10.3
NetCN6_2: CN6.2 F1.1 R18.2 R22.1 RE1.4 T1.1 T2.3 | length 7404.2
  Top Layer w20: T2.3 T2.3@400,1438.39 ; 436,718.69 RE1.4 ; R22.1 1331.06,1974.5
  Top Layer w40: T2.3@400,1438.39 400,1434.27 445.86,1388.41 445.86,1210.11 400,1164.26 400,754.69 436,718.69 ; RE1.4 812.69,718.69 828.64,734.64 T1.1 ; 1331.06,1974.5 1409.56,2053 v1(1659,2053) 1725,2119 1725,2376.01 1767.99,2419 1813.1,2419 1836.54,2442.43 R18.2
  Bottom Layer w20: 2545.65,246 2555,236.65
  Bottom Layer w40: T2.3 387.69,1460.33 411.36,1484 1432,1484 1659,1711 v1(1659,2053) ; T1.1 1536.36,734.64 1923,348 1923,187 2227.29,187 CN6.2 2401.9,236.65 2555,236.65 2562.15,236.65 2598.75,273.25 2598.75,289.75 3146.68,837.68 F1.1
NetCN7_1: CN7.1 RE1.5 | length 3140
  Top Layer w20: RE1.5 v1(637,818.69)
  Bottom Layer w20: v1(637,818.69) 637,737 694,680 952,680 1197,435 1422,435 1505.39,351.61 1506.5,351.61 1537.24,320.87 1537.24,319.76 1778,79 3035.66,79 3057.37,100.72 CN7.1
NetCN7_2: CN7.2 RE1.8 | length 4718.1
  Top Layer w20: v1(159,773.38) 159,809.01 RE1.8
  Bottom Layer w20: v1(159,773.38) 150.88,773.38 125.6,748.09 103.72,748.09 92,736.38 92,159 213,38 2518.71,38 3287.28,38 3309,59.72 3309,289 3236,362 2917.73,362 CN7.2
NetD2_2: D2.2 RE1.12 T5.1 | length 9921
  Top Layer w20: RE1.12 203,418.69 247.69,418.69 v1(248,419) ; RE1.12@203.64,409.01 203.64,258.37 215.36,246.65 761.77,246.65 767.95,246.65 773.06,250.14 921.33,351.61 964.8,351.61 995.55,320.87 995.55,277.39 964.8,246.65 827.36,141 83.29,141 54,170.29 54,558.9 47.03,565.87 47.03,4220.95 99.08,4273 2140.2,4273 D2.2 ; T5.1 1034,1072.05 v1(1034,497)
  Bottom Layer w20: v1(248,419) 956,419 v1(1034,497)
NetIC1_1: IC1.1 R20.1 | length 333.8
  Top Layer w20: IC1.1 911,2901.24 932.24,2880 R20.1
NetIC1_2: IC1.2 K2.2 R1.1 | length 3387.5
  Top Layer w20: IC1.2 1099,3130 1361,3130 1364,3127 1364,2658.02 1396.02,2626 R1.1
  Bottom Layer w20: IC1.2 1204,3235 1329.84,3235 1353.95,3259.11 2201.11,3259.11 2561,3619 2561,3671 2668,3778 2882,3778 K2.2
NetIC1_7: IC1.7 K4.1 | length 293.9
  Top Layer w20: K4.1 1507.46,2893 1511,2896.54 IC1.7
NetIC1_8: IC1.8 K4.2 | length 293.9
  Top Layer w20: K4.2 1607.46,2893 1611,2896.54 IC1.8
NetIC1_11: IC1.11 R22.2 R23.1 ZD1.1 | length 3747.9
  Top Layer w20: R22.2 1396.02,1952.54 R23.1@1572.39,1952.54 ; R23.1 R23.1@1572.39,1952.54 ; v1(1911,3164) IC1.11 1911,2867 1851,2807 1851,2612.5 1939,2524.5 1939,2365.24 1902,2328.24 1812,2328.24 1799,2315.24 1799,1982 1789,1972 1699,1972 1682,1989 1586,1989 1572.39,1975.39 R23.1@1572.39,1952.54
  Bottom Layer w20: v1(1911,3164) 2274.98,3164 2658,3547.02 2658,3669 2718,3729 3041,3729 3226,3914 ZD1.1
NetIC1_12: IC1.12 K3.1 | length 675.8
  Top Layer w20: IC1.12 2101,3132 2236,3132 2261,3107 2261,2833.77 K3.1
NetIC1_13: IC1.13 K3.2 | length 828
  Bottom Layer w20: IC1.13 1858,2789 1858,2731 1886,2703 2178.66,2703 K3.2
NetIC1_14: IC1.14 K3.3 | length 313.8
  Top Layer w20: K3.3 2211,2835.34 IC1.14
NetIC1_15: IC1.15 K3.4 | length 747.1
  Top Layer w20: K3.4 2089.77,2705 2390,2705 2390,2906.82 2311,2985.82 IC1.15
NetIC1_16: IC1.16 K3.5 | length 592.8
  Bottom Layer w20: K3.5 2079.66,2904 2273,2904 IC1.16
NetIC1_19: IC1.19 R24.2 | length 2885
  Top Layer w20: R24.2 1105.05,2087 1160.05,2142 v1(1456,2142) ; v1(2405,2365) 2492,2452 2861,2452 2886,2477 2886,2567 2828,2625 2828,2925 IC1.19
  Bottom Layer w20: v1(1456,2142) 1456,2343 1529,2416 2354,2416 v1(2405,2365)
NetIC1_20: IC1.20 K1.1 | length 551.6
  Bottom Layer w20: IC1.20 3161.6,3392.6 K1.1
NetIC1_21: IC1.21 K1.2 | length 633.2
  Bottom Layer w20: IC1.21 3259.5,3649.5 3272,3637 3272,3547.24 K1.2
NetIC1_22: IC1.22 K1.3 | length 529.9
  Bottom Layer w20: IC1.22 2767.9,3592.6 K1.3
NetIC1_23: IC1.23 K5.3 | length 1249.5
  Top Layer w20: K5.3 2351,4122 2472,4243 2622,4243 2622,4040 2502,3920 2502,3833 2611,3724 IC1.23
NetIC1_24: IC1.24 K5.2 | length 257.4
  Top Layer w20: K5.2 2451,3795 2511,3735 IC1.24
NetIC1_27: IC1.27 K7.1 | length 517.7
  Bottom Layer w20: K7.1 1843,3765 2095.5,3765 IC1.27
NetIC1_28: IC1.28 K7.4 | length 624.8
  Top Layer w20: K7.4 1958,4024 2067,4024 2111,3980 IC1.28
NetIC1_30: IC1.30 K7.5 | length 212.4
  Top Layer w20: IC1.30 1971,3709.5 K7.5
NetIC1_33: IC1.33 K6.1 | length 297.4
  Top Layer w20: K6.1 1611,3718.49 IC1.33
NetIC1_34: IC1.34 K6.2 | length 297.4
  Top Layer w20: K6.2 1349.47,3811.03 IC1.34
NetIC1_35: IC1.35 J1.8 R3.1 | length 4183.9
  Top Layer w20: IC1.35 1458.5,3602 1636,3602 1657.58,3623.58 1657.58,3954.21 1913,4209.64 1999,4209.64 2300,3908.64 2300,3732 2264,3696 2264,3546.41 2458,3352.41 2458,2641.45 2383.9,2567.35 R3.1
  Bottom Layer w20: J1.8 1184.49,3422.99 IC1.35
NetIC1_36: IC1.36 J1.4 R2.1 | length 4291.6
  Top Layer w20: IC1.36 1311,3265 v1(1375,3201) ; R2.1 2087.86,2270.86 2118,2301 2118,2381 2420,2683 2420,2956 2361,3015 v1(2361,3352)
  Bottom Layer w20: J1.4 459.4,3382 1216,3382 1458,3624 1458,3673 1434.92,3696.08 1357.58,3696.08 IC1.36 ; v1(1375,3201) 1383,3209 2218,3209 v1(2361,3352)
NetIC1_37: IC1.37 J1.3 | length 1442.6
  Bottom Layer w20: J1.3 188.58,3341.1 188.58,3577.32 317.69,3706.43 1154.07,3706.43 IC1.37
NetIC1_38: IC1.38 J1.5 | length 1355.1
  Top Layer w20: J1.5 218,3298.08 218,3131 236,3113 574.5,3113 IC1.38
NetIC1_39: IC1.39 J1.7 | length 967.8
  Bottom Layer w20: J1.7 218.58,3468.58 218.58,3529.9 236,3547.32 908.82,3547.32 IC1.39
NetIC2_1: IC2.1 R13.1 R15.1 | length 2911.5
  Top Layer w20: R15.1 1170.01,2286.01 1210,2326 1493,2326 v1(1508,2311) ; R13.1 v1(2152.82,2561) ; v1(2654,2365) 2861,2365 2886.9,2339.1 2886.9,2252.8 IC2.1
  Bottom Layer w20: v1(1508,2311) 1508,2119 1486,2097 1436,2097 1411,2122 1411,2380 1391,2400 1391,2450 1502,2561 v1(2152.82,2561) 2162.82,2551 2431,2551 2524,2458 2561,2458 v1(2654,2365)
NetIC2_2: IC2.2 R11.2 R17.2 | length 1259.6
  Top Layer w20: R17.2 1836.54,2262 1872.77,2298.24 1946.76,2298.24 1990.28,2254.72 1990.28,2187 2030.59,2146.69 2343.59,2146.69 2383.9,2187 R11.2 2383.9,2244 2506,2258 2842.38,2274.5 IC2.2
NetIC2_6: IC2.6 R7.2 R10.2 | length 2172.3
  Top Layer w20: R7.2 1105.05,2462 1142.05,2425 v1(1436,2425) ; R10.2 v1(2152.82,2070)
  Bottom Layer w20: v1(1436,2425) 1487,2476 2375.38,2476 2443.1,2408.28 IC2.6 2196.62,2070 v1(2152.82,2070)
NetIC2_7: IC2.7 R7.1 R9.2 | length 5550.8
  Top Layer w20: v1(768,2087.72) 867.28,2187 R9.2@867.28,2225 ; v1(780,2225) R9.2@867.28,2225 ; R9.2 R9.2@867.28,2225 ; R7.1 v1(1170.01,2551)
  Bottom Layer w20: v1(768,2087.72) 768,1587 801,1554 1368,1554 1479,1665 1479,1873 1554,1948 1554,2323 1586,2355 1686.43,2355 1712.93,2328.5 1829.5,2328.5 2136,2022 2248.62,2022 IC2.7 ; v1(780,2225) 768,2213 374,2213 276,2311 276,2742 336,2802 919.01,2802 v1(1170.01,2551)
NetIC3_2: IC3.2 LD1.5 | length 395.7
  Top Layer w20: IC3.2 2454,5992.23 LD1.5
NetIC3_3: IC3.3 LD1.6 | length 395.7
  Top Layer w20: IC3.3 2259,5897.24 2259,6121 LD1.6
NetIC3_4: IC3.4 LD1.7 | length 395.7
  Top Layer w20: IC3.4 2214,5952.23 2214,6176 LD1.7
NetIC3_5: IC3.5 LD1.8 | length 395.7
  Top Layer w20: IC3.5 2154,5992.23 LD1.8
NetIC3_6: IC3.6 LD1.9 | length 395.7
  Top Layer w20: IC3.6 2054,5992.23 LD1.9
NetIC3_7: IC3.7 LD1.10 | length 395.7
  Top Layer w20: IC3.7 1914,5952.23 1914,6176 LD1.10
NetIC3_8: IC3.8 LD1.11 | length 395.7
  Top Layer w20: IC3.8 1854,5992.23 LD1.11
NetIC3_9: IC3.9 LD1.12 | length 395.7
  Top Layer w20: IC3.9 1754,5992.23 LD1.12
NetIC3_12: IC3.12 LD1.4 | length 1547
  Bottom Layer w20: IC3.12 1705.86,5490.94 2331.94,5490.94 2376,5535 2376,6038 LD1.4
NetIC3_13: IC3.13 LD1.3 | length 1948
  Bottom Layer w20: IC3.13 1689,5607.79 1609.79,5607.79 1589,5587 1589,5502 1630.06,5460.94 2407.94,5460.94 2654,5707 LD1.3
NetIC3_14: IC3.14 LD1.2 | length 1603.4
  Bottom Layer w20: IC3.14 1875.86,5520.94 2261,5520.94 2276,5535.94 2276,5998 2399,6121 2399,6237 2423,6261 2709,6261 LD1.2
NetIC3_15: IC3.15 LD1.1 | length 1495.6
  Top Layer w20: IC3.15 1932.43,5739.43 1986,5793 2236,5793 2289,5846 2289,5914 2404,6029 2404,6241.5 2423.5,6261 2809,6261 LD1.1
NetIC3_17: IC3.17 J9.8 | length 1901.8
  Top Layer w20: IC3.17 v1(2132.43,5702.57)
  Bottom Layer w20: J9.8 2066.78,5768.22 v1(2132.43,5702.57)
NetIC3_18: IC3.18 J9.4 | length 1878
  Bottom Layer w20: J9.4 423.05,5637.79 2159,5637.79 IC3.18
NetL2_1: L2.1 T2.2 | length 2431.5
  Bottom Layer w40: T2.2 387.08,1360.33 419.29,1328.13 428.28,1328.13 445.86,1310.55 445.86,1292.54 561.39,1177 831.51,1177 926.51,1082 2472.34,1082 L2.1
NetR11_1: R11.1 R13.2 | length 631.6
  Top Layer w20: R13.2 2087.86,2367.73 2051.12,2331 2051.12,2187.79 2318.94,2187.79 R11.1
NetR18_1: R18.1 T1.2 T3.1 T4.2 | length 2260.4
  Top Layer w20: T4.2 1190.59,1107.98 T3.1 1489.39,1406.79 v1(1489.39,1463.61) ; v1(1744,2017) 1744,2081.43 1765,2102.43 1765,2323.66 1817.63,2376.29 1848.87,2376.29 1901.5,2428.92 R18.1
  Bottom Layer w20: T1.2 1043,837 1043.21,836.79 T4.2 ; v1(1489.39,1463.61) 1489.39,1470.39 1744,1725 v1(1744,2017)
NetR19_1: R19.1 T1.3 T4.3 | length 2039.5
  Top Layer w20: R19.1 932.24,2488.83 969,2452.07 969,1903 783,1717 783,1643 836,1590 836,1044.36 T1.3
  Bottom Layer w20: T1.3 993.57,886.79 T4.3
NetR19_2: R19.2 T2.1 | length 2421.1
  Top Layer w20: T2.1 320,1318.39 320,1487 370,1537 568,1537 641,1464 641,1212 684,1169 761,1169 776,1184 776,1527 723,1580 723,2252.72 867.28,2397 R19.2
NetR20_2: R20.2 R21.2 T3.2 | length 2478.7
  Top Layer w20: v1(722,1232) 722,1240.12 693,1269.12 693,2480.72 867.28,2655 867.28,2687 ; R20.2 867.28,2687 ; R21.2 1170.01,2762 1155.01,2777 1076,2777 969,2670 884.28,2670 867.28,2687
  Bottom Layer w20: v1(722,1232) 730.12,1232 744.33,1217.79 1153.03,1217.79 T3.2
NetR24_1: R24.1 R25.1 T5.2 | length 1946.7
  Top Layer w20: T5.2 1072.99,1265.35 1432.64,1625 1551.43,1625 ; R24.1 1170.01,1837 1229.01,1778 1398.43,1778 1551.43,1625 ; R25.1 1901.5,1904.5 1793,1796 1793,1682 1736,1625 1551.43,1625
pads on no net: ENC1.6 ENC1.7 IC1.3 IC1.4 IC1.25 IC1.26 IC1.40 IC3.10 IC3.11 IC3.19 IC3.20 J1.6 J9.6 RE1.3 RE1.10
copper on no net: | length 10910.3
  Bottom Layer w10: 41,4390.86 41,6416.14 46.86,6422 3460.14,6422 3466,6416.14 3466,4390.86 3460.14,4385 46.86,4385 41,4390.86

## Polygon pours and split planes (outlines as drawn)
GND on Top Layer "GND_L01_P002" (solid, pour order 2): 19,21 20,20 3490,20 3490,4348 3482,4348 21,4348
GND on Bottom Layer "GND_L02_P003" (solid, pour order 3): 21,4348 21,21 20,20 3490,20 3490,4344 3486,4348

## Other copper
Top Layer:
  text "Anish Pun" at 2910,4512 h60

## Silkscreen, mask and mechanical layers (free items; w line width, h text height)
Board Outline:
  lines w10: -1,-3 -1,5 -1,6472 3516,6472 3516,-3 -1,-3

## Text inside footprints (layer, text, board x,y; h text height)
LD1: Top Overlay "12" at 1717,6072 h60; Top Overlay "1" at 2847,6062 h60